# EAGLE board LESR (EAGLE 9.5.2)
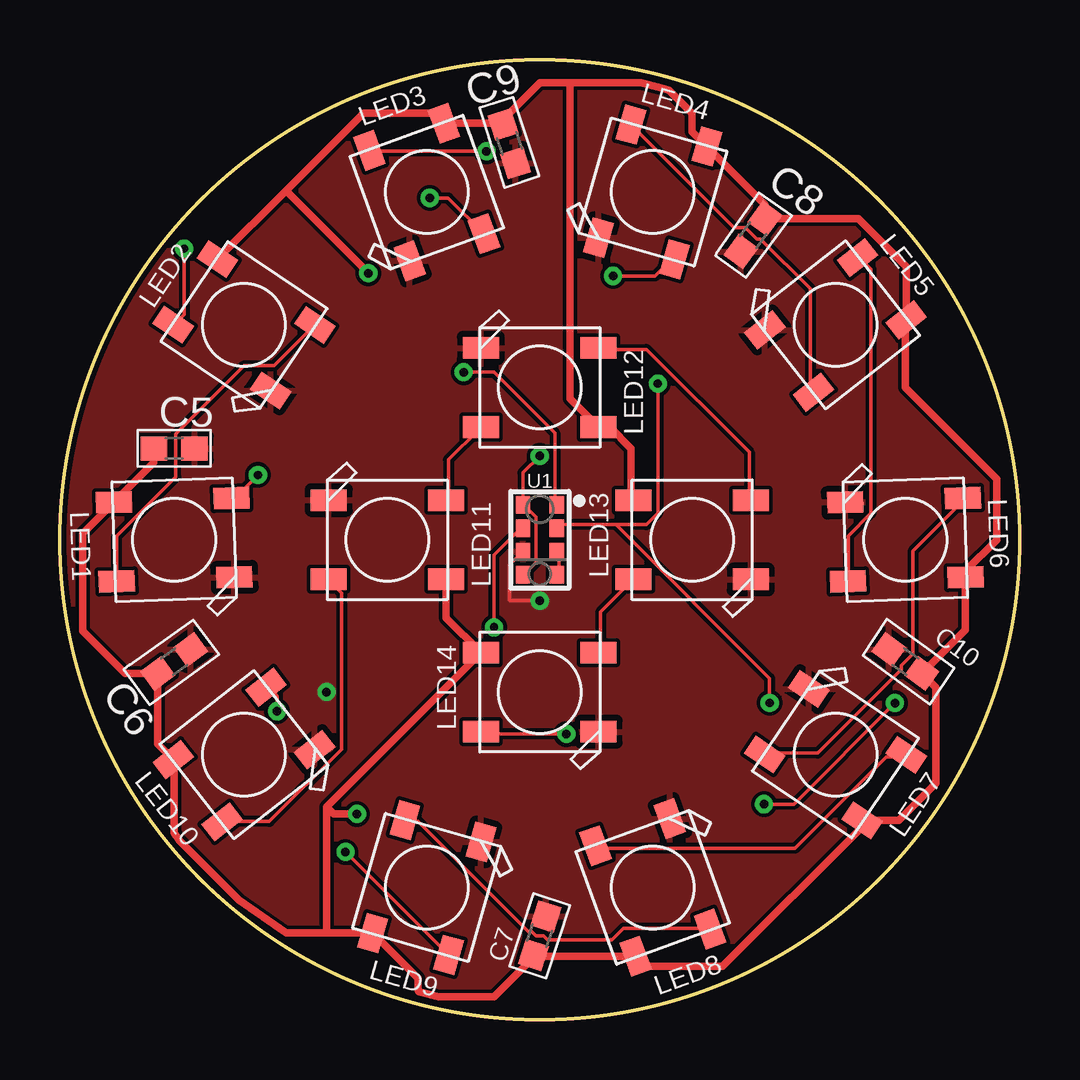
[diagram p0: board, top side]
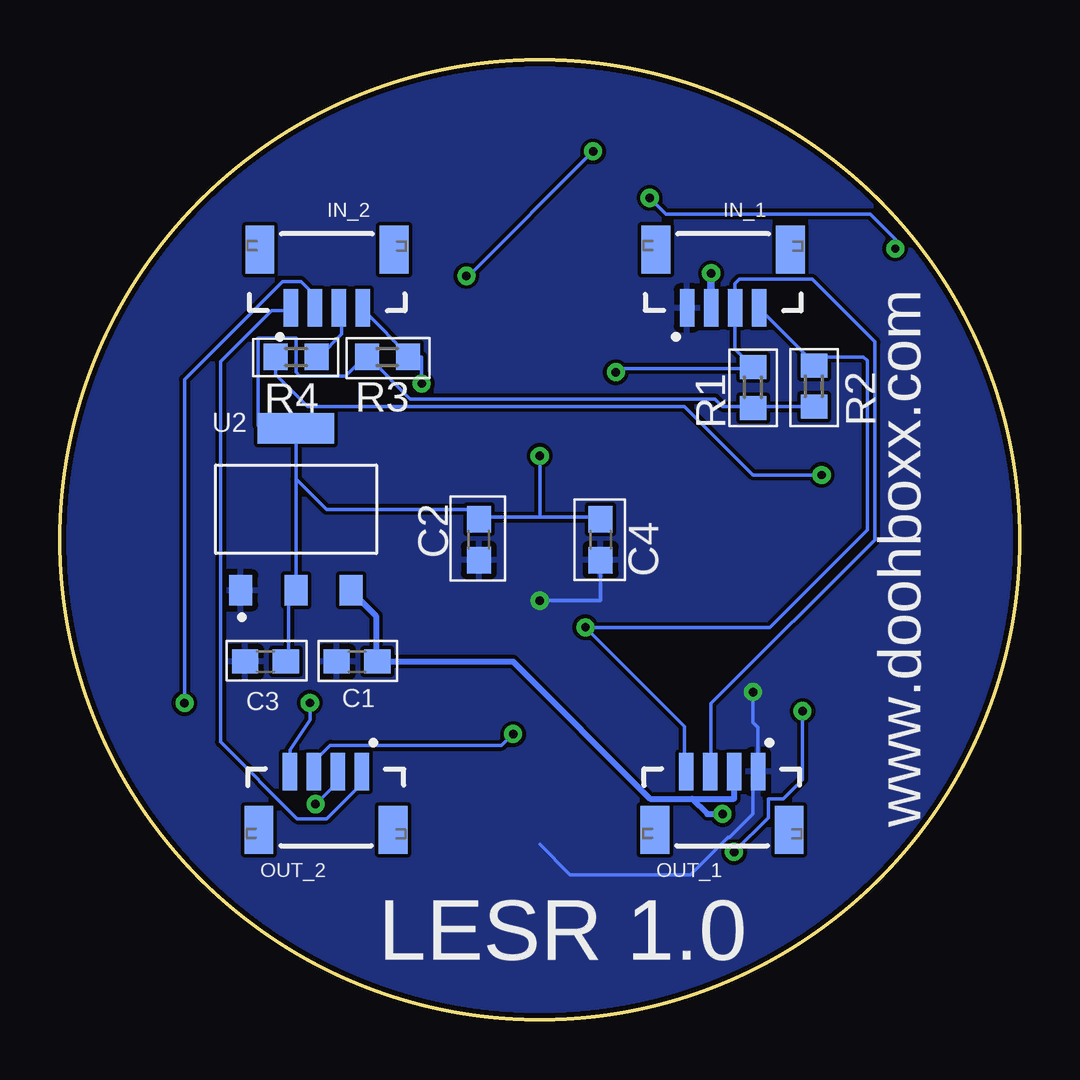
[diagram p1: board, bottom side, seen from below]

Size 40 x 40 mm. Coordinates in mm from the lower left corner, seen from the top.
Outline: circle at 20,20 radius 20
Copper layers (1*16): Top 0.035mm / dielectric 1.5mm / Bottom 0.035mm
Design rules "default *": minimum track width 6mil, minimum drill 0.35mm, track to track 6mil, track to pad 6mil, pad to pad 6mil, via to via 6mil, smd to smd 6mil, copper to edge 8mil, drill to drill 6mil, minimum pad ring 10mil, minimum via ring 8mil, stop-mask expansion 4mil, vias tented up to drill 0mil, thermal gap 10mil

## Footprints (pad centres in the part's own frame; a part is rotated, then mirrored left to right if it is on the bottom)
C0603 = smd 1.1 x 1: 1 -0.85,0; 2 0.85,0
JST04_1MM_VERT = smd 0.6 x 1.55: 1 -1.478,0.775; 2 -0.478,0.775; 3 0.522,0.775; 4 1.522,0.775 | smd 1.2 x 2: NC1 -2.778,3.2; NC2 2.822,3.2
WS2812B = smd 1.5 x 0.9: 1-VDD 2.45,-1.65; 2-DOUT 2.45,1.65; 3-GND -2.45,1.65; 4-DIN -2.45,-1.65
R0603 = smd 1 x 1.1: 1 -0.85,0; 2 0.85,0
APDS-9960 = smd 0.6 x 0.72: 1 0.7,1.455; 2 0.7,0.485; 3 0.7,-0.485; 4 0.7,-1.455; 5 -0.7,-1.455; 6 -0.7,-0.485; 7 -0.7,0.485; 8 -0.7,1.455
SOT-223 = smd 0.96 x 1.26: 1 -2.3,-3.375; 2 0,-3.375; 3 2.3,-3.375 | smd 3.19 x 1.26: 4 0,3.375

## Placement (x,y rotation side)
C1  10uF  [C0603]  27.62,14.92 180 bottom
C2  1uF  [C0603]  22.54,20 270 bottom
C3  10uF  [C0603]  31.43,14.92 180 bottom
C4  1uF  [C0603]  17.46,20 270 bottom
C5  1uF  [C0603]  4.76,23.81 0 top
C6  1uF  [C0603]  4.76,14.92 36 top
C7  1uF  [C0603]  20,3.49 72 top
C8  1uF  [C0603]  28.89,32.7 234 top
C9  1uF  [C0603]  18.73,36.51 288 top
C10  1uF  [C0603]  35.24,14.92 144 top
IN_1  https://www.tanotis.com/products/sparkfun-qwiic-jst-connector-smd-4-pin  [JST04_1MM_VERT]  12.38,28.89 0 bottom
IN_2  https://www.tanotis.com/products/sparkfun-qwiic-jst-connector-smd-4-pin  [JST04_1MM_VERT]  28.89,28.89 0 bottom
LED1  WS2812B5050  [WS2812B]  4.76,20 182 top
LED2  WS2812B5050  [WS2812B]  7.67,28.96 146 top
LED3  WS2812B5050  [WS2812B]  15.29,34.49 110 top
LED4  WS2812B5050  [WS2812B]  24.71,34.49 74 top
LED5  WS2812B5050  [WS2812B]  32.33,28.96 38 top
LED6  WS2812B5050  [WS2812B]  35.24,20 2 top
LED7  WS2812B5050  [WS2812B]  32.33,11.04 326 top
LED8  WS2812B5050  [WS2812B]  24.71,5.51 290 top
LED9  WS2812B5050  [WS2812B]  15.29,5.51 254 top
LED10  WS2812B5050  [WS2812B]  7.67,11.04 218 top
LED11  WS2812B5050  [WS2812B]  13.65,20 0 top
LED12  WS2812B5050  [WS2812B]  20,26.35 0 top
LED13  WS2812B5050  [WS2812B]  26.35,20 180 top
LED14  WS2812B5050  [WS2812B]  20,13.65 180 top
OUT_1  https://www.tanotis.com/products/sparkfun-qwiic-jst-connector-smd-4-pin  [JST04_1MM_VERT]  12.38,11.11 180 bottom
OUT_2  https://www.tanotis.com/products/sparkfun-qwiic-jst-connector-smd-4-pin  [JST04_1MM_VERT]  28.89,11.11 180 bottom
R1  4.7k  [R0603]  11.11,26.35 270 bottom
R2  4.7k  [R0603]  8.57,26.4 270 bottom
R3  4.7k  [R0603]  26.35,27.62 180 bottom
R4  470  [R0603]  30.16,27.62 180 bottom
U1  APDS-9960  [APDS-9960]  20,20 0 top
U2  NCP1117ST33T3G  [SOT-223]  30.16,21.27 0 bottom

## Library data of the parts
C1-C10 = rcl; SPICEPREFIX: C
IN_1 IN_2 OUT_1 OUT_2 = SparkFun-Connectors; PROD_ID: CONN-14483
LED1-LED14 = WS2812B; AVAILABILITY: Unavailable; DESCRIPTION: Raspberry Pi HAT _40 pin_ Wheeled Robotics Kit; MF: SparkFun Electronics; MP: WS2812B; PACKAGE: None; PRICE: None
R1-R4 = rcl; SPICEPREFIX: R
U1 = APDS-9960; AVAILABILITY: Unavailable; DESCRIPTION: Optical Sensor Ambient 560nm I²C 8-SMD Module; MF: Broadcom Limited; MP: APDS-9960; PACKAGE: SMD-8 Broadcom; PRICE: None
U2 = IC; CREATED_BY: PCBLayout.com; DIGIKEY_PART_NUMBER: NCP1117ST33T3GOSTR-ND; MANUFACTURER: ON Semiconductor; MPN: NCP1117ST33T3G; PACKAGE: SOT-223

## Nets
1: IN_2.1 OUT_2.1
2: IN_2.2 OUT_2.2
3.3V: C2.1 C3.1 C4.1 R1.2 R2.2 R3.2 U1.5 U1.8 U2.2 U2.4
5V: C1.1 C5.1 C6.1 C7.1 C8.1 C9.1 C10.1 IN_1.2 LED1.1-VDD LED2.1-VDD LED3.1-VDD LED4.1-VDD LED5.1-VDD LED6.1-VDD LED7.1-VDD LED8.1-VDD LED9.1-VDD LED10.1-VDD LED11.1-VDD LED12.1-VDD LED13.1-VDD LED14.1-VDD OUT_1.2 U2.3
DIN: IN_2.3 R4.1
DOUT: LED14.2-DOUT OUT_2.3
GND: C1.2 C2.2 C3.2 C4.2 C5.2 C6.2 C7.2 C8.2 C9.2 C10.2 IN_1.1 LED1.3-GND LED2.3-GND LED3.3-GND LED4.3-GND LED5.3-GND LED6.3-GND LED7.3-GND LED8.3-GND LED9.3-GND LED10.3-GND LED11.3-GND LED12.3-GND LED13.3-GND LED14.3-GND OUT_1.1 U1.6 U2.1
INT: IN_2.4 OUT_2.4 R3.1 U1.2
N$1: LED1.4-DIN R4.2
N$2: U1.3 U1.4
N$10: LED6.2-DOUT LED7.4-DIN
N$11: LED7.2-DOUT LED8.4-DIN
N$12: LED8.2-DOUT LED9.4-DIN
N$13: LED9.2-DOUT LED10.4-DIN
N$14: LED1.2-DOUT LED2.4-DIN
N$15: LED2.2-DOUT LED3.4-DIN
N$16: LED3.2-DOUT LED4.4-DIN
N$17: LED4.2-DOUT LED5.4-DIN
N$18: LED11.2-DOUT LED12.4-DIN
N$19: LED13.2-DOUT LED14.4-DIN
N$20: LED12.2-DOUT LED13.4-DIN
N$21: LED5.2-DOUT LED6.4-DIN
N$22: LED10.2-DOUT LED11.4-DIN
SCL: IN_1.4 OUT_1.4 R2.1 U1.7
SDA: IN_1.3 OUT_1.3 R1.1 U1.1

## Tracks (layer width: path | path; a pad name or v marks a point on that pad's centre or on a via)
1
  Bottom 0.152: OUT_2.1 27.52,10.2 27.52,9.74 28.89,8.37 30.11,8.37 33.31,11.57 33.31,27.42 31.18,29.55 30.41,29.55 IN_2.1
2  (via drill 0.35)
  Top 0.152: v29.35,8.98 30.59,8.98 v34.81,13.19
  Bottom 0.152: v29.35,8.98 28.43,9.89 28.43,10.2 OUT_2.2 | v34.81,13.19 34.81,26.68 30.72,30.77 29.96,30.77 29.5,30.31 29.5,29.7 IN_2.2
3.3V  (via drill 0.35)
  Top 0.152: U1.5 19.37,18.57 19.84,19.05 19.84,20.95 19.37,21.43 U1.8 19.3,22.79 v20,23.49
  Bottom 0.152: 11.11,25.56 12.38,25.56 12.7,25.87 25.4,25.87 27.14,27.62 R3.2 27.3,27.62 28.1,26.83 30,26.83 30.16,26.98 30.16,28.41 31.75,28.41 31.75,24.76 30.16,24.76 U2.4 30.16,22.54 | 11.11,25.56 R2.2 | 11.11,25.56 R1.2 | 20,20.95 22.54,20.95 C2.1 22.96,21.27 28.89,21.27 30.16,22.54 | 20,20.95 17.46,20.95 C4.1 | 20,20.95 v20,23.49 | C3.1 30.48,14.92 30.48,17.78 30.16,17.78 U2.2 30.16,22.54
5V  (via drill 0.35)
  Top 0.152: 15.58,37.78 LED3.1-VDD | 18.43,37.36 C9.1 | 29.39,33.98 C8.1 | C7.1 19.78,2.64
  Top 0.305: C5.1 3.91,23.22 LED1.1-VDD 0.95,20.26 0.95,16.19 2.72,14.42 C6.1 4.07,11.49 LED10.1-VDD 4.76,10.8 4.76,7.78 4.99,7.46 7.46,4.98 9.43,3.61 11.11,3.61 | LED2.1-VDD 9.42,34.55 | 9.42,34.55 12.65,37.78 15.58,37.78 | LED3.1-VDD 18.43,37.36 18.43,37.47 20,39.05 21.27,39.05 | 29.39,33.98 LED4.1-VDD 26.35,37.02 26.35,37.78 25.39,38.74 25.02,38.84 24.22,39.05 21.27,39.05 | C8.1 33.28,33.39 35.28,31.39 LED5.1-VDD 35.28,28.93 35.24,28.89 35.24,26.35 39.05,22.54 39.05,20 37.75,18.7 LED6.1-VDD 37.75,16.24 C10.1 36.51,13.84 36.51,9.84 34.97,8.3 LED7.1-VDD 33.44,8.04 27.62,2.22 24.42,2.22 LED8.1-VDD 19.78,2.64 18.09,0.95 15.78,0.95 14.98,1.16 14.92,1.22 14.92,1.71 LED9.1-VDD 11.11,3.61 | LED11.1-VDD 16.1,16.75 LED14.1-VDD 11.11,8.86 | LED13.1-VDD 23.81,21.74 23.81,23.81 22.92,24.7 LED12.1-VDD 21.27,25.88 21.27,39.05 | 11.11,8.86 11.11,3.61 | 9.42,34.55 v12.86,31.11 | 11.11,8.86 11.4,8.57 v12.38,8.57
  Bottom 0.152: 12.86,29.68 IN_1.2 | 26.83,14.92 C1.1 | 27.78,17.78 U2.3 | OUT_1.2 11.9,10.32
  Bottom 0.254: 26.83,14.92 26.83,16.82 27.78,17.78 | 11.9,10.32 11.9,9.2 13.65,9.2 | 13.65,9.2 15.4,9.2 21.11,14.92 C1.1 | 13.65,9.2 13.02,8.57 v12.38,8.57
  Bottom 0.305: v12.86,31.11 12.86,29.68
DIN
  Bottom 0.152: R4.1 29.21,27.62 28.26,28.57 28.26,29.52 IN_2.3
DOUT  (via drill 0.35)
  Top 0.152: v21.11,11.9 17.62,11.9 LED14.2-DOUT
  Bottom 0.152: v21.11,11.9 21.59,11.43 28.73,11.43 29.37,10.79 29.37,10.47 OUT_2.3
GND  (via drill 0.35)
  Top 0.152: v20,17.46 18.73,17.46 18.73,18.96 18.91,19.13 18.92,19.13 U1.6
  Bottom 0.152: 20,7.3 18.73,6.03 13.71,6.03 12.16,7.59 12.09,7.59 11.11,8.57 11.11,10.13 OUT_1.1 10.9,12.17 11.11,12.38 v11.11,13.65 | C4.2 17.46,17.46 v20,17.46
  pour Top: -2.86,40.32 40.32,40.32 40.32,0.95 39.05,-0.32 -4.13,-0.32 -4.13,40.32
  pour Bottom: -2.86,40.32 44.13,40.32 45.4,39.05 45.4,-1.59 -4.13,-1.59 -5.4,-0.32 -5.4,37.78
INT  (via drill 0.35)
  Top 0.152: 23.18,20.63 24.45,20.63 24.92,21.11 v24.92,26.51 | 23.18,20.63 20.79,20.63 U1.2 | v29.58,13.2 29.58,14.23 23.18,20.63
  Bottom 0.152: v24.92,26.51 24.92,27.62 25.4,27.62 | v29.58,13.2 29.58,12.48 30.41,11.24 OUT_2.4 | 25.4,27.62 27.3,29.52 IN_2.4 | 25.4,27.62 R3.1
N$1  (via drill 0.35)
  Top 0.152: v8.25,22.7 7.3,21.75 LED1.4-DIN
  Bottom 0.152: v8.25,22.7 11.11,22.7 13.97,25.56 29.68,25.56 31.01,26.88 R4.2
N$2
  Top 0.152: U1.4 20.79,18.57 20.79,19.36 U1.3
N$10
  Top 0.152: LED7.4-DIN 29.52,11.11 31.59,11.11 35.08,14.6 35.08,14.76 35.56,15.24 35.56,19.52 37.62,21.59 LED6.2-DOUT
N$11
  Top 0.152: LED8.4-DIN 22.38,7.14 30.64,7.14 34.45,10.95 35.24,10.95 LED7.2-DOUT
N$12
  Top 0.152: LED9.4-DIN 14.44,8.25 14.92,8.25 19.52,3.65 19.68,3.65 19.84,3.49 20.16,3.49 20.32,3.33 23.02,3.33 23.49,3.81 26.98,3.81 LED8.2-DOUT
N$13  (via drill 0.35)
  Top 0.152: v11.9,6.98 LED9.2-DOUT | v9.05,12.86 9.05,13.49 8.73,13.81 LED10.4-DIN
  Bottom 0.152: v11.9,6.98 10.48,8.41 10.48,9.2 9.84,9.2 9.05,10 v9.05,12.86
N$14
  Top 0.152: LED2.4-DIN 8.92,27.25 7.68,27.25 4.83,24.41 4.83,22.62 2.37,20.16 LED1.2-DOUT
N$15  (via drill 0.35)
  Top 0.152: v5.18,32.13 5.18,29.39 4.75,28.96 LED2.2-DOUT | LED3.4-DIN 16.19,34.25 v15.42,34.25
  Bottom 0.152: v15.42,34.25 14.73,33.56 6.22,33.56 5.18,32.52 v5.18,32.13
N$16  (via drill 0.35)
  Top 0.152: v17.78,36.19 13.02,36.19 LED3.2-DOUT | v23.05,31 24.81,31 25.56,31.75 LED4.4-DIN
  Bottom 0.152: v17.78,36.19 22.97,31 v23.05,31
N$17
  Top 0.152: LED5.4-DIN 31.27,26.19 31.27,30.48 29.21,32.54 29.05,32.54 28.57,33.02 28.1,33.02 LED4.2-DOUT
N$18
  Top 0.152: LED11.2-DOUT 16.19,21.75 16.19,23.33 17.46,24.6 LED12.4-DIN
N$19
  Top 0.152: LED14.4-DIN 22.54,15.4 22.54,16.98 23.81,18.25 LED13.2-DOUT
N$20
  Top 0.152: LED13.4-DIN 28.73,21.75 28.73,23.65 24.45,27.94 22.54,27.94 LED12.2-DOUT
N$21
  Top 0.152: LED6.4-DIN 32.86,18.41 32.86,20.16 33.81,21.11 33.81,31.27 33.34,31.75 LED5.2-DOUT
N$22
  Top 0.152: LED10.2-DOUT 6.82,8.25 8.73,8.25 11.75,11.27 11.75,17.78 11.27,18.25 LED11.4-DIN
SCL  (via drill 0.35)
  Top 0.152: v18.1,16.35 18.1,19.36 19.21,20.48 U1.7
  Bottom 0.152: OUT_1.4 13.97,10.47 13.97,12.22 v18.1,16.35 10.4,16.35 6.35,20.4 6.35,27.46 6.51,27.62 8.57,27.62 8.69,27.5 | IN_1.4 8.69,27.5 | 8.69,27.5 8.57,27.38 R2.1
SDA  (via drill 0.35)
  Top 0.152: v16.83,26.98 18.1,26.98 20.64,24.45 20.64,21.59 U1.1
  Bottom 0.152: v16.83,26.98 16.67,27.14 11.11,27.14 R1.1 11.86,27.95 IN_1.3 11.86,30.68 11.68,30.86 8.64,30.86 6.03,28.25 6.03,20 12.86,13.17 12.86,10.47 OUT_1.3
(copper drawn outside any net)
  shapes: Top circle x1

## Text on the board
bNames: www.doohboxx.com | LESR 1.0